# EAGLE board PCB (EAGLE 8.3.1)
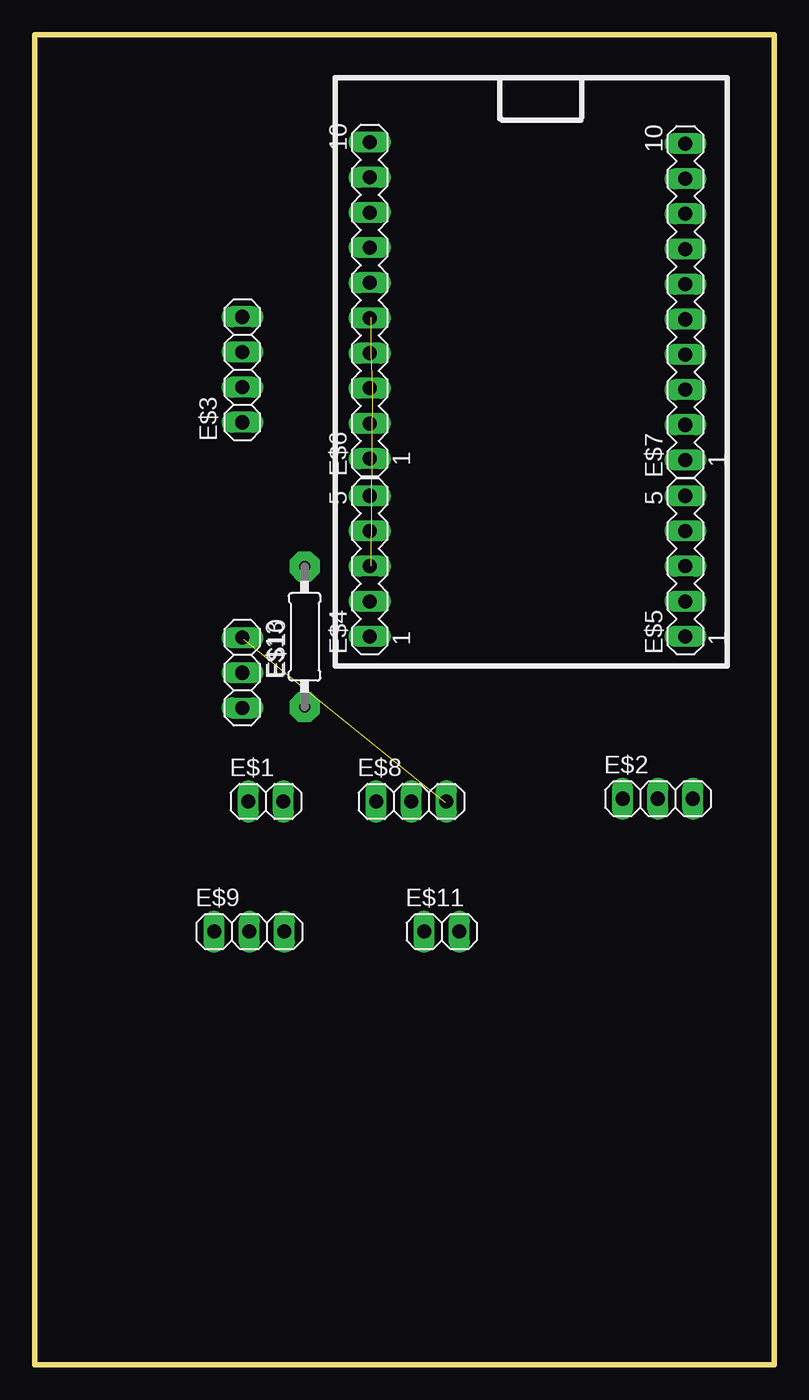
[diagram p0: board, top side]
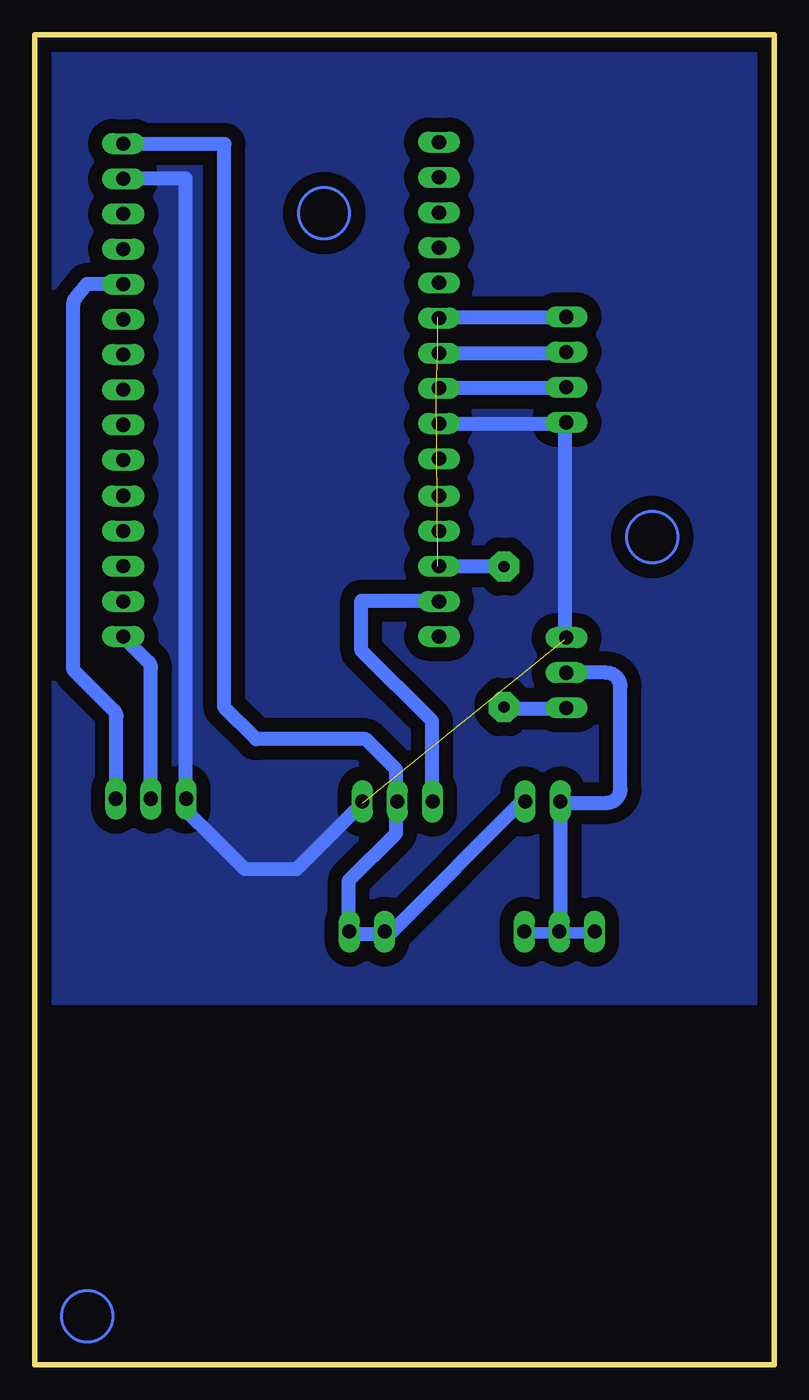
[diagram p1: board, bottom side, seen from below]

Size 53.4 x 96.1 mm. Coordinates in mm from the lower left corner, seen from the top.
Outline: 53.4,96.1 0,96.1 0,0 53.4,0 53.4,95.9
Copper layers (1*16): Top 0.035mm / dielectric 1.5mm / Bottom 0.035mm
Design rules "default": minimum track width 10mil, minimum drill 24mil, track to track 8mil, track to pad 8mil, pad to pad 8mil, via to via 8mil, smd to smd 8mil, copper to edge 40mil, drill to drill 8mil, minimum pad ring 10mil, minimum via ring 8mil, stop-mask expansion 4mil, vias tented up to drill 0mil, thermal gap 10mil

## Footprints (pad centres in the part's own frame; a part is rotated, then mirrored left to right if it is on the bottom)
1X02 = drill 1.016 long: 1 -1.27,0; 2 1.27,0
1X03 = drill 1.016 long: 1 -2.54,0; 2 0,0; 3 2.54,0
1X04 = drill 1.016 long: 1 -3.81,0; 2 -1.27,0; 3 1.27,0; 4 3.81,0
MA05-1 = drill 1.016 long: 1 -5.08,0; 2 -2.54,0; 3 0,0; 4 2.54,0; 5 5.08,0
MA10-1 = drill 1.016 long: 1 -11.43,0; 2 -8.89,0; 3 -6.35,0; 4 -3.81,0; 5 -1.27,0; 6 1.27,0; 7 3.81,0; 8 6.35,0; 9 8.89,0; 10 11.43,0
0207/10 = drill 0.813 pad 2.184 octagon: 1 -5.08,0; 2 5.08,0

## Placement (x,y rotation side)
E$1  [1X02]  16.7,40.7 0 top
E$2  [1X03]  45,40.9 0 top
E$3  [1X04]  15,71.9 90 top
E$4  [MA05-1]  24.2,57.7 90 top
E$5  [MA05-1]  47,57.7 90 top
E$6  [MA10-1]  24.2,76.9 90 top
E$7  [MA10-1]  47,76.8 90 top
E$8  [1X03]  27.2,40.7 0 top
E$9  [1X03]  15.5,31.3 0 top
E$10  [1X03]  15,50 270 top
E$11  [1X02]  29.4,31.3 0 top
E$13  [0207/10]  19.5,52.6 90 top

## Library data of the parts
E$1-E$3 E$8-E$11 = pinhead
E$4-E$7 = con-lstb
E$13 = resistor

## Nets
S$15: E$2.2

## Tracks (layer width: path | path; a pad name or v marks a point on that pad's centre or on a via)
3.5VDC
  Bottom 1.016: 47.5,40.9 47.5,46.84 arc-45 47.69,47.29 50.6,50.2 50.6,76.64 arc45 50.41,77.09 49.6,78.1 46.8,78.1
5VDC  (via drill 0.35)
  Bottom 1.016: 47.3,88.2 39.7,88.2 39.7,47.5 37.4,45.2 29.5,45.2 27.3,43 27.3,38.4 30.7,35 v30.7,31.1 27.8,31.1 18.1,40.8
GND  (1 unrouted)
  Bottom 1.016: 47.2,85.7 42.5,85.7 42.5,40.6 42.46,40 40.36,37.96 38.2,35.8 34.5,35.8 29.7,40.6 | 24.2,68 15.1,68 15.1,52.4
  pour Bottom (isolate 1.016): 0.2,95.9 0,26.52 arc90 0.32,26.2 53.1,26.2 53.3,95.68 arc90 52.98,96 0.3,96
S$1  (3 unrouted)
  Bottom 1.016: 24.4,70.6 15,70.6 | 24.3,73.1 14.9,73.1 | 24.3,75.7 14.9,75.7 | 24.3,57.7 19.6,57.7
S$2
  Bottom 1.016: 24.7,40.6 24.7,46.5 29.8,51.6 29.8,55.2 24.1,55.2
S$3
  Bottom 0.813: 13,31.2 18.1,31.2 18.2,31.3
S$9
  Bottom 1.016: 15.4,30.9 15.4,40.6 12.1,40.6 arc-90 11.1,41.6 11.1,49 arc-90 12.1,50 15.1,50
S$13
  Bottom 1.016: 14.8,47.4 19.5,47.4
S$15
  Bottom 1.016: E$2.2 45,50.34 arc-45 45.19,50.79 47.1,52.7
(copper drawn outside any net)
  shapes: Bottom circle x3